# Altium PCB PCB1.PcbDoc
Units mil, origin at the board's own origin, x right, y up, seen from the top; angles counter-clockwise.
Board outline 6000 x 4000 mil, 2 copper layers (Top Layer, Bottom Layer); 21 components, 29 nets, 116 pads, 0 vias.
Unrouted connection lines stored in the file: 3.
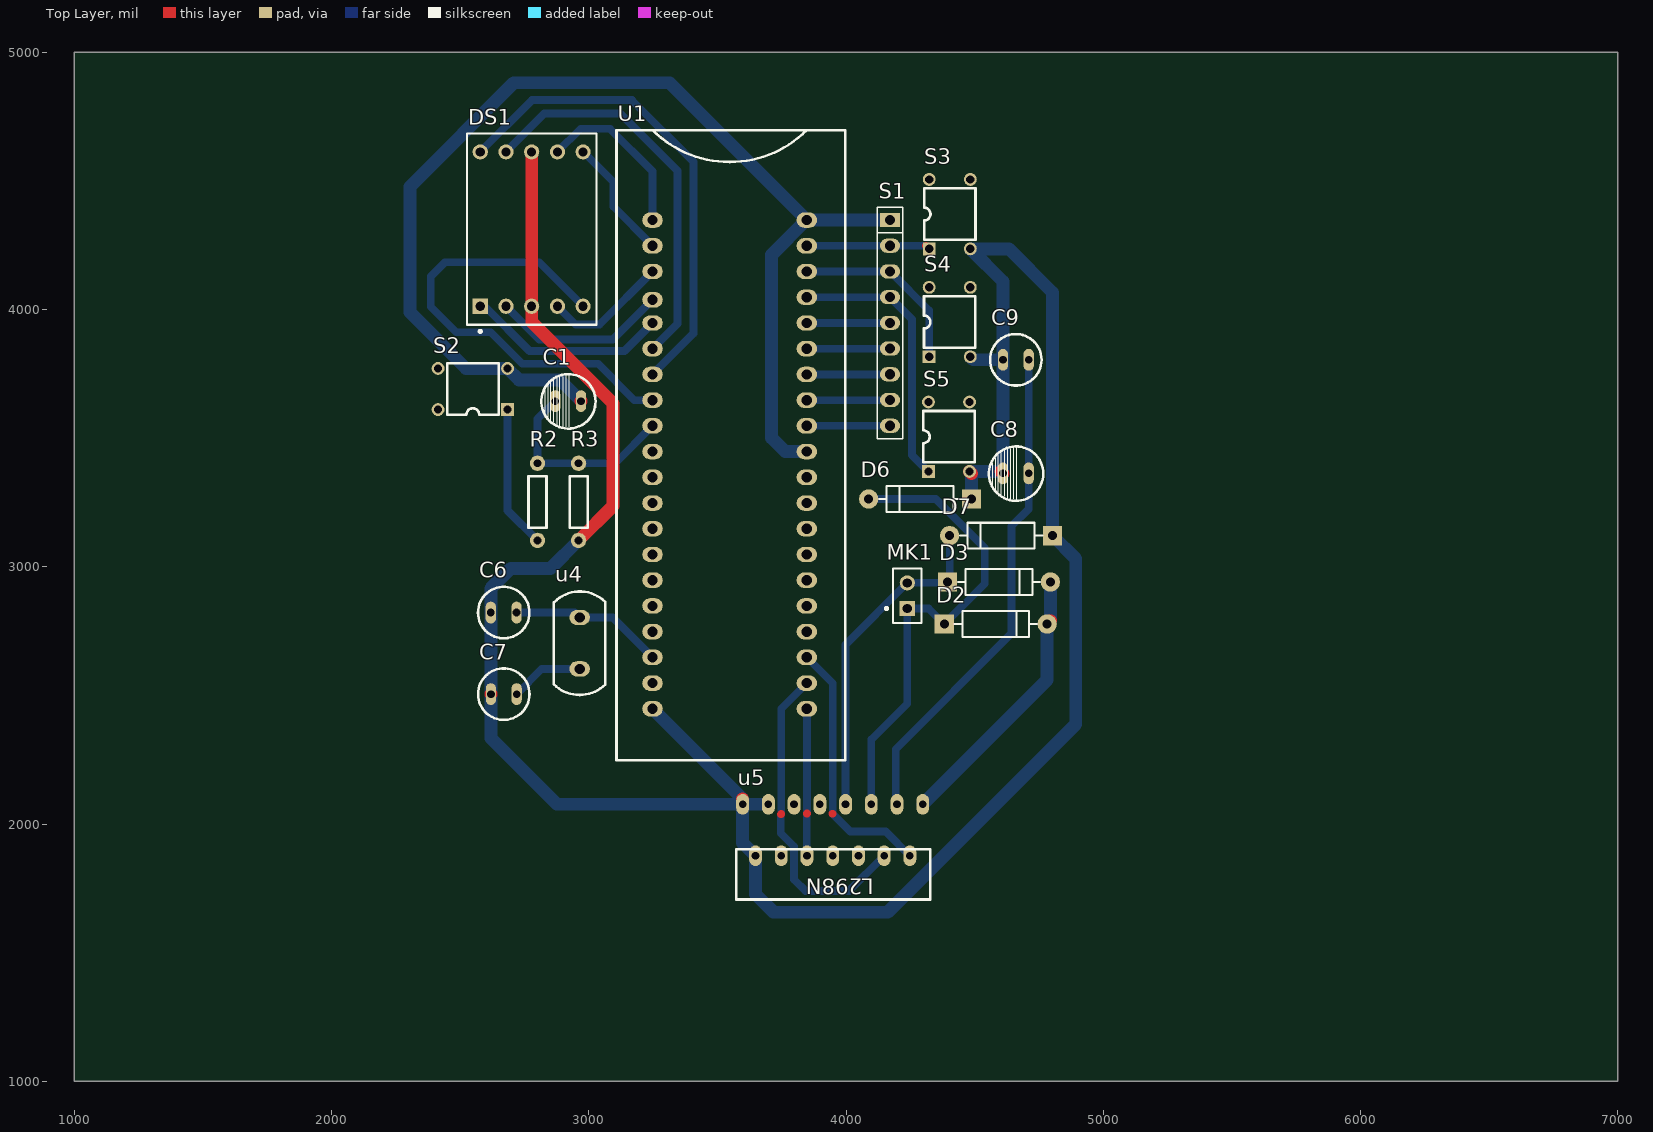
[diagram p0: Top Layer view]
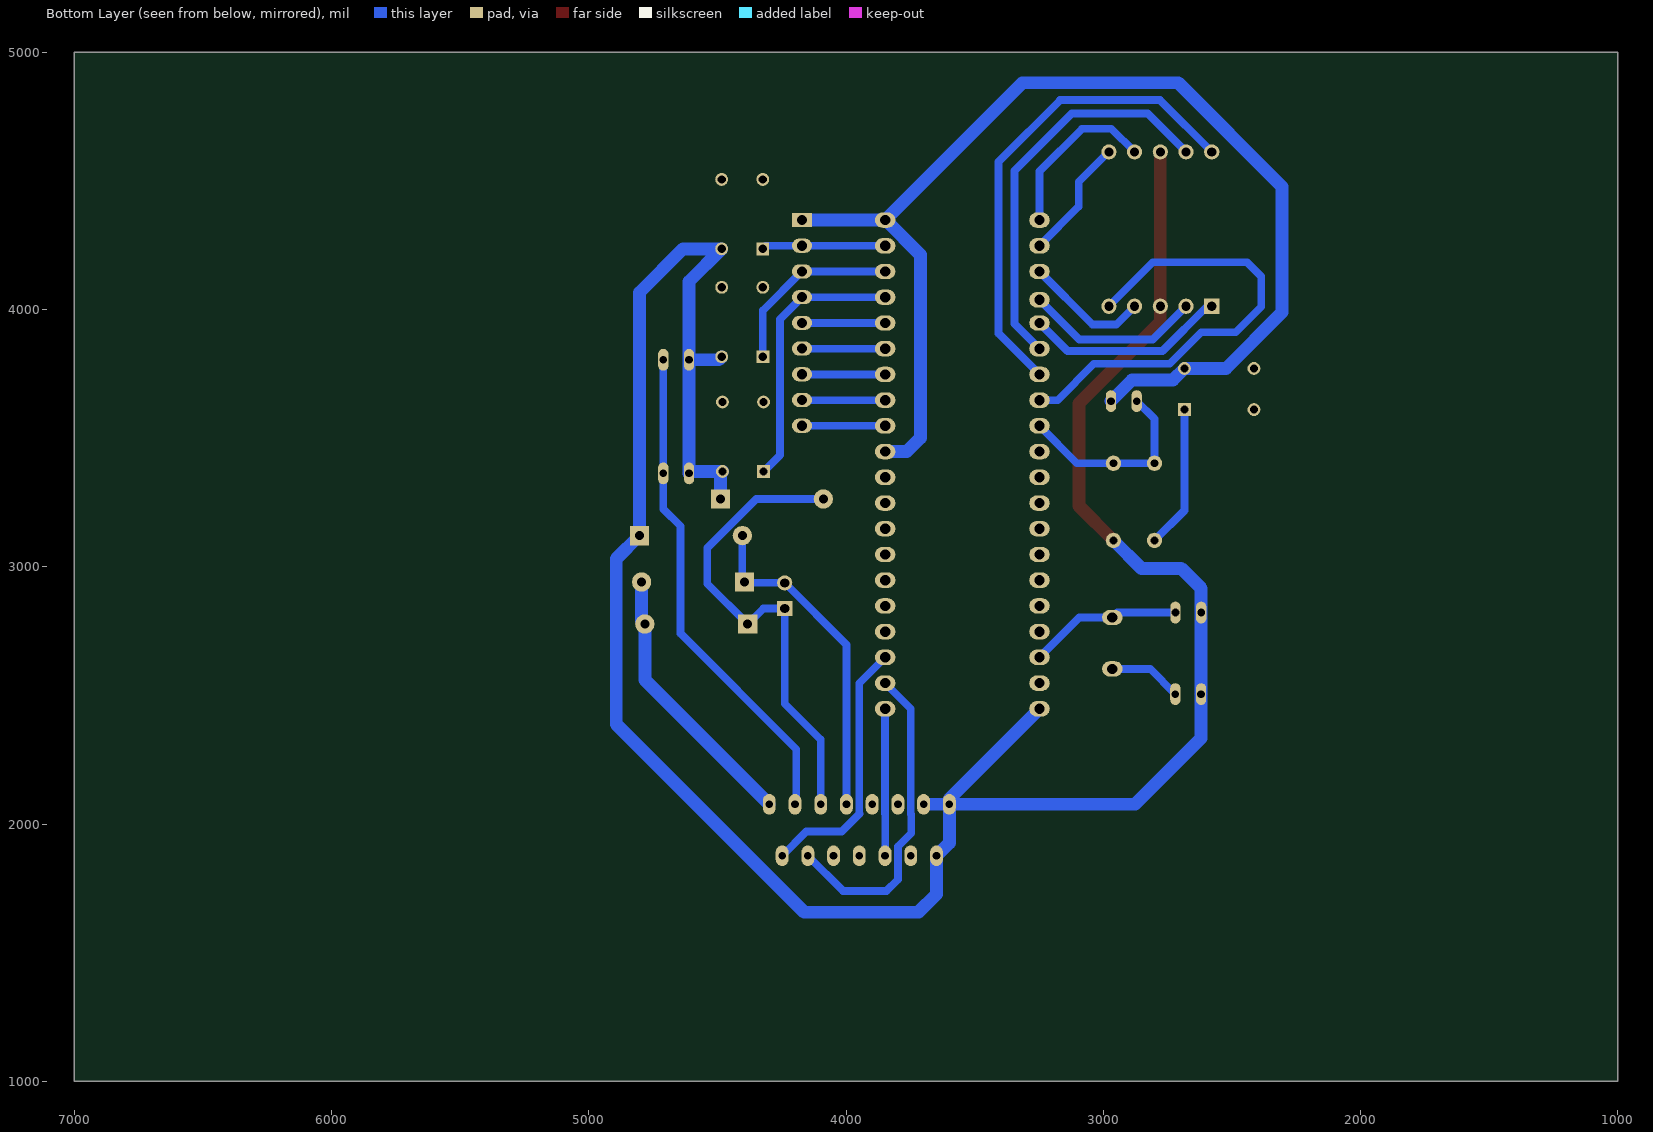
[diagram p1: Bottom Layer view, seen from below]

## Layer stack, top to bottom
Top Solder: solder mask 0.4, Solder Resist, Dk 3.5
Top Layer: signal copper 1.4
Dielectric 1: dielectric 12.6, FR-4, Dk 4.8
Bottom Layer: signal copper 1.4
Bottom Solder: solder mask 0.4, Solder Resist, Dk 3.5

## Board outline
1000,1000 7000,1000 7000,5000 1000,5000

## Design rules (kind name [scope] priority, off if disabled: settings)
Clearance [All] p1: gap=10 ignorepadtopadclearanceinfootprint=FALSE except(0: Arc-Hole Track-Hole SMDPad-Hole THPad-Hole Via-Hole Fill-Hole Poly-Hole Region-Hole Text-Hole)
PolygonConnect [All] p1: connectstyle=Relief reliefconductorwidth=10 reliefentries=4 polygonreliefangle="90 Angle" airgapwidth=10
RoutingVias [All] p1: holewidth=28 width=50 viastyle="Through Hole" minholewidth=28 minwidth=50 maxholewidth=28 maxwidth=50
SolderMaskExpansion [All] p1: expansion=4
Width PWR_5 [InNet('+5V')] p1: maxlimit=50 minlimit=50 preferedwidth=50 minimp=50.000000 maximp=50.000000 favimp=50.000000
Width VCC [InNet('VCC')] p2: maxlimit=50 minlimit=50 preferedwidth=50 minimp=50.000000 maximp=50.000000 favimp=50.000000
Width GND [InNet('GND')] p3: maxlimit=50 minlimit=50 preferedwidth=50 minimp=50.000000 maximp=50.000000 favimp=50.000000
Width SINGAL [All] p4: maxlimit=30 minlimit=30 preferedwidth=30 minimp=50.000000 maximp=50.000000 favimp=50.000000
Width [All] p5: maxlimit=30 minlimit=30 preferedwidth=30 minimp=50.000000 maximp=50.000000 favimp=50.000000
30 further rules are at their usual default settings.

## Components (designator, comment, footprint, x,y, rotation, side; value= is the part's Value field where it differs from the comment)
C1 "10μF" 电解电容 2969.85,3643.86 r180 top
C6 "22PF" 瓷片电容 2719.29,2821.85 r0 top
C7 "22PF" 瓷片电容 2719.61,2504.77 r0 top
C8 "100uf" 电解电容 4710.2,3363.16 r180 top
C9 "0.1uF" 瓷片电容 4610.2,3804.59 r180 top
D2 "1N4007" "二极管 直插" 4582.05,2777.32 r0 top
D3 "1N4007" "二极管 直插" 4594.63,2940.81 r0 top
D6 "1N4007" "二极管 直插" 4288.07,3263.34 r180 top
D7 "1N4007" "二极管 直插" 4603.01,3121.08 r180 top
DS1 "Dpy Blue-CC" LEDDIP-10/C15.24RHD 2778.11,4312.84 r0 top
MK1 "直流电机" PIN2 4238.29,2837.4 r90 top
R2 "1K" 电阻 2795.76,3247.4 r90 top
R3 "1K" 电阻 2955.27,3247.28 r90 top
S1 "10K" SIP9 4171,4348.18 r270 top
S2 "SW-PB" ANJIAN 2549.26,3590.96 r180 top
S3 "SW-PB" ANJIAN 4303.45,4370.98 r90 top
S4 "SW-PB" ANJIAN 4303.2,3951.43 r90 top
S5 "SW-PB" ANJIAN 4300.43,3505.47 r90 top
U1 "STC12" STC52 3247.83,4347.75 r0 top
u4 "XTAL" 晶振. 2964.41,2602.87 r180 top
u5 "L298N" L298N 3948.25,1876.58 r180 top

## Footprints (in the part's own frame and the unit in brackets; to place one, negate y for a bottom-side part, rotate by r counter-clockwise, add the part's x,y. Pads: shape width x height; smd on the part's side, far side on the other; paste and mask are expansions set on the pad)
ANJIAN [mil]
  rect 50x50 hole 32: 1(-135,-20)
  round 50 hole 32: 2(-135,-180) 3(135,-180) 4(135,-20)
  silkscreen extent -100,-200 100,0
L298N [mil]
  oval 50x80 hole 30: 1(350,-200) 2(-150,-200) 3(-50,-200) 4(-350,-200) 5(-300,0) 6(100,0) 7(-200,0) 8(300,0) 9(-250,-200) 10(-100,0) 11(200,0) 12(0,0) 13(50,-200) 14(150,-200) 15(250,-200)
  silkscreen extent -380,-25 375,170, body extent -384,-221 373,176, height 600
LEDDIP-10/C15.24RHD [mm]
  rect 1.5x1.5 hole 0.9: 1(-5.08,-7.62)
  round 1.5 hole 0.9: 2(-2.54,-7.62) 3(0,-7.62) 4(2.54,-7.62) 5(5.08,-7.62) 6(5.08,7.62) 7(2.54,7.62) 8(0,7.62) 9(-2.54,7.62) 10(-5.08,7.62)
  silkscreen extent -6.4,-10.22 6.4,9.45, body extent -6.4,-9.45 6.4,9.45, height 8.25
PIN2 [mm]
  rect 1.5x1.5 hole 0.9: 1(0,0)
  round 1.5 hole 0.9: 2(2.54,0)
  silkscreen extent -1.4,-1.4 3.94,2.17
SIP9 [mm]
  rect 1.4x2 hole 1: 1(0,0)
  oval 1.4x2 hole 1: 2(2.54,0) 3(5.08,0) 4(7.62,0) 5(10.16,0) 6(12.7,0) 7(15.24,0) 8(17.78,0) 9(20.32,0)
  silkscreen extent -1.27,-1.27 21.59,1.27, body extent -1.27,-1.27 21.59,1.27, height 8.89
STC52 [mil]
  oval 80x60 hole 40: 1(0,0) 2(0,-100) 3(0,-200) 4(0,-310) 5(0,-400) 6(0,-500) 7(0,-600) 8(0,-700) 9(0,-800) 10(0,-900) 11(0,-1000) 12(0,-1100) 13(0,-1200) 14(0,-1300) 15(0,-1400) 16(0,-1500) 17(0,-1600) 18(0,-1700) 19(0,-1800) 20(0,-1900) 21(600,-1900) 22(600,-1800) 23(600,-1700) 24(600,-1600) 25(600,-1500) 26(600,-1400) 27(600,-1300) 28(600,-1200) 29(600,-1100) 30(600,-1000) 31(600,-900) 32(600,-800) 33(600,-700) 34(600,-600) 35(600,-500) 36(600,-400) 37(600,-300) 38(600,-200) 39(600,-100) 40(600,0)
  silkscreen extent -140,-2100 750,350, body extent -18,-1935 623,36, height 370
"二极管 直插" [mil]
  rect 75x75 hole 35: 1(-200,0)
  round 75 hole 35: 2(200,0)
  silkscreen extent -160,-50 160,50, body extent -211,-52 211,54, height 103
晶振. [mil]
  oval 80x60 hole 40: 1(0,0) 2(0,-200)
  silkscreen extent -100,-301 100,101, body extent -104,-309 102,108, height 80
瓷片电容 [mil]
  oval 40x85 hole 30: 1(-100,0) 2(0,0)
  silkscreen extent -150,-100 50,100, body extent -150,-97 48,102, height 300
电解电容 [mil]
  oval 40x85 hole 30: 1(0,0) 2(100,0)
  silkscreen extent -57,-105 155,107, body extent -61,-111 158,109, height 261
电阻 [mil]
  round 60 hole 30: 1(-145,-5) 2(155,-5)
  silkscreen extent -95,-40 105,30

## Part data
C1: library part CAPACITOR, "Capacitor"
C6 C7: library part 瓷片电容
C8: library part 电解电容
C9: library part 瓷片电容_1
D2 D3 D6 D7: PackageDocument=Aug-1999, Code_JEDEC=DO-204-AL, ComponentLink1Description="Manufacturer Link", ComponentLink1URL=http://www.fairchildsemi.com/, ComponentLink2Description=Datasheet, ComponentLink2URL=http://www.fairchildsemi.com/ds/1N%2F1N4001.pdf, DatasheetDocument=1998, LatestRevisionDate=17-Jul-2002, LatestRevisionNote="Re-released for DXP Platform.", PackageReference=DO-41, Published=8-Jun-2000, Publisher="Altium Limited"
DS1: "14.2 mm General Purpose Blue 7-Segment Display: CC, RH DP, Gray Surface", Colour=Blue, ComponentLink1Description="Manufacturer Link", ComponentLink1URL=http://www.agilent.com/, DatasheetVersion=24-Sep-2002, LatestRevisionDate=17-Dec-2003, LatestRevisionNote="Schematic revised, PCB Footprint replaced.", MinimumIntensity="2020 ucd", Note="IF = 10 mA", PackageReference=H, PackageVersion=24-Sep-2002, Published=8-Jun-2000, Publisher="Altium Limited"
MK1: library part Mic2, "Microphone", LatestRevisionDate=17-Jul-2002, LatestRevisionNote="Re-released for DXP Platform.", PackageReference=PIN2, Published=24-Mar-1999, Publisher="Altium Limited"
R2 R3: library part R
S1: library part RES-9
U1: library part 12单片机

## Nets (pads, with @x,y where several pads share a name; then routed paths per layer and width w, separated by ;. In a path a pad name is that pad's centre, name@x,y a point inside that pad or via, vN(x,y) a via of type N, cw(c..) or ccw(c..) an arc to the next point about the centre after c; other vN are vias at no path point)
+5V: C1.1 S1.1 S2.2 U1.31 U1.40 | length 4615.3
  Top Layer w50: C1.1 C1.1@2969.85,3644.14 ; U1.40@3845.9,4347.75 U1.40 ; S1.1@4170.57,4347.75 S1.1
  Bottom Layer w50: C1.1@2969.85,3644.14 2888.13,3725.86 2729.35,3725.86 S2.2 2522.88,3770.96 2304.67,3989.16 2304.67,4477.31 2708.79,4881.42 3314.15,4881.42 U1.40 S1.1@4170.57,4347.75 ; U1.40@3845.9,4347.75 3711.03,4212.87 3711.03,3500.32 3763.6,3447.75 U1.31
+12V: C8.1 C9.1 u5.9 | length 1944
  Top Layer w30: u5.9@4193.49,2081.34 u5.9
  Bottom Layer w30: u5.9@4193.49,2081.34 4193.49,2290.95 4643.12,2740.58 4643.12,3157.62 4710.2,3224.7 C8.1 C9.1
ENA: U1.21 u5.6 | length 571.7
  Top Layer w30: u5.6@3847.83,1877.01 u5.6 ; 3847.83,2040.01 3848.25,2040.44 ; U1.21 U1.21@3848.25,2447.32
  Bottom Layer w30: u5.6@3847.83,1877.01 3847.83,2040.01 ; 3848.25,2040.44 U1.21@3848.25,2447.32
GND: C6.1 C7.1 C8.2 C9.2 D6.1 D7.1 DS1.3 DS1.8 R3.1 S3.2 S4.2 S5.2 U1.20 u5.1 u5.8 u5.15 | length 9753
  Top Layer w50: C7.1@2619.29,2505.09 C7.1 ; DS1.8 DS1.3 2778.11,3951.86 3094.9,3635.06 3094.9,3236.91 R3.1 ; u5.1 u5.1@3598.25,2097.32 ; S5.2 S5.2@4488.07,3362.84 ; C8.2@4602.89,3370.47 C8.2
  Bottom Layer w50: C7.1@2619.29,2505.09 C6.1 2619.29,2916.12 2697,2993.84 2851.83,2993.84 R3.1 ; C7.1 2619.61,2333.23 2876.26,2076.58 u5.1 ; U1.20 u5.1@3598.25,2097.32 ; u5.15 u5.1 ; S5.2 C8.2@4602.89,3370.47 ; S4.2 4495.03,3804.59 C9.2 ; D6.1 S5.2@4488.07,3362.84 ; C8.2 C9.2 ; u5.1 3598.25,1926.58 u5.8 3648.25,1727.16 3718.67,1656.75 4161.99,1656.75 4893.23,2387.98 4893.23,3030.86 D7.1 4803.01,4066.36 4633.39,4235.98 S3.2 4610.2,4109.23 C9.2
in1: U1.23 u5.5 | length 1018.1
  Top Layer w30: 3947.65,2039.66 3948.25,2040.26
  Bottom Layer w30: U1.23 3948.25,2547.32 3948.25,2040.26 ; 3947.65,2039.66 4016.62,1970.68 4154.15,1970.68 u5.5
in2: U1.22 u5.7 | length 1251.9
  Top Layer w30: 3746.66,2037.67 3748.25,2039.27
  Bottom Layer w30: 3746.66,2037.67 3746.66,1963.89 3798.25,1912.29 3798.25,1784.04 3842.43,1739.86 4011.54,1739.86 u5.7 ; 3748.25,2039.27 3748.25,2448.18 U1.22
NetC1_2: C1.2 R2.2 R3.2 U1.9 | length 777.4
  Top Layer w30: R3.2@2960.14,3402.4 R3.2
  Bottom Layer w30: C1.2 2800.76,3574.77 R2.2 R3.2@2960.14,3402.4 ; R3.2 3102.35,3402.28 U1.9
NetC6_2: C6.2 U1.18 u4.2 | length 600.7
  Bottom Layer w30: C6.2 2945.43,2821.85 u4.2 3092.7,2802.87 U1.18
NetC7_2: C7.2 u4.1 | length 285.4
  Bottom Layer w30: C7.2 2817.71,2602.87 u4.1
NetR2_1: R2.1 S2.1 | length 556.8
  Bottom Layer w30: S2.1 2684.26,3218.91 R2.1
NetS1_5: S1.5 U1.36 | length 323.4
  Top Layer w30: S1.5@4170.57,3947.75 S1.5
  Bottom Layer w30: U1.36 S1.5@4170.57,3947.75
NetS1_6: S1.6 U1.35 | length 323.4
  Top Layer w30: S1.6@4170.57,3847.75 S1.6
  Bottom Layer w30: U1.35 S1.6@4170.57,3847.75
NetS1_7: S1.7 U1.34 | length 323.4
  Top Layer w30: S1.7@4170.57,3747.75 S1.7
  Bottom Layer w30: U1.34 S1.7@4170.57,3747.75
NetS1_8: S1.8 U1.33 | length 323.4
  Top Layer w30: S1.8@4170.57,3647.75 S1.8
  Bottom Layer w30: U1.33 S1.8@4170.57,3647.75
NetS1_9: S1.9 U1.32 | length 323.4
  Top Layer w30: S1.9@4170.57,3547.75 S1.9
  Bottom Layer w30: U1.32 S1.9@4170.57,3547.75
OUT1: D2.1 D6.2 MK1.1 u5.2 | length 1878.5
  Bottom Layer w30: D6.2 4349.13,3263.34 4539.36,3073.11 4539.36,2934.63 D2.1 4321.97,2837.4 MK1.1 4238.29,2468.15 4098.25,2328.11 u5.2
OUT2: D3.1 D7.2 MK1.2 u5.3 | length 1301.7
  Top Layer w30: D3.1@4391.22,2937.4 D3.1 D3.1@4403.01,2949.2
  Bottom Layer w30: u5.3 3998.25,2697.37 MK1.2 D3.1@4391.22,2937.4 ; D3.1@4403.01,2949.2 D7.2
P0.1: S1.2 S3.1 U1.39 | length 480.9
  Top Layer w30: S1.2@4170.57,4247.75 S1.2 ; S3.1@4311.25,4248.18 S3.1
  Bottom Layer w30: U1.39 S1.2@4170.57,4247.75 ; S1.2 S3.1@4311.25,4248.18
P0.2: S1.3 S4.1 U1.38 | length 718.2
  Top Layer w30: U1.38 U1.38@3848.26,4148.18
  Bottom Layer w30: U1.38@3848.26,4148.18 S1.3 4323.2,3995.99 S4.1
P0.3: S1.4 S5.1 U1.37 | length 1063
  Top Layer w30: S1.4@4170.57,4047.75 S1.4
  Bottom Layer w30: U1.37 S1.4@4170.57,4047.75 ; S1.4 4256.66,3962.53 4256.66,3434.24 S5.1
P1.0: DS1.7 U1.1 | length 665.6
  Bottom Layer w30: DS1.7 2968.49,4703.22 3082.28,4703.22 3247.83,4537.67 U1.1
P1.1: DS1.6 U1.2 | length 476.8
  Bottom Layer w30: DS1.6 3094.65,4496.3 3094.65,4400.93 U1.2
P1.2: DS1.4 U1.3 | length 484.7
  Bottom Layer w30: DS1.4 2949.5,3941.45 3041.52,3941.45 U1.3
P1.3: DS1.2 U1.4 | length 700.3
  Top Layer w30: U1.4@3234.76,4037.75 U1.4
  Bottom Layer w30: DS1.2 2807.46,3883.48 3093.56,3883.48 U1.4
P1.4: DS1.1 U1.5 | length 787
  Bottom Layer w30: DS1.1 2595.61,4012.84 2769.71,3838.74 3138.82,3838.74 U1.5
P1.5: DS1.9 U1.6 | length 1552.8
  Bottom Layer w30: DS1.9 2827.22,4761.95 3122.84,4761.95 3344.83,4539.97 3344.83,3944.75 U1.6
P1.6: DS1.10 U1.7 | length 1904.7
  Bottom Layer w30: DS1.10 2779.42,4814.15 3167.82,4814.15 3407.22,4574.75 3407.22,3907.15 U1.7
P1.7: DS1.5 U1.8 | length 1815.4
  Bottom Layer w30: DS1.5 2807.48,4183.47 2441.16,4183.47 2386.17,4128.47 2386.17,4010.38 2484.85,3911.69 2619.12,3911.69 2742.07,3788.75 3036.5,3788.75 3177.49,3647.75 U1.8
VCC: D2.2 D3.2 u5.4 | length 1069.8
  Top Layer w50: D2.2 D2.2@4794.63,2789.89
  Bottom Layer w50: u5.4 4782.05,2560.38 D2.2 ; D2.2@4794.63,2789.89 D3.2
pads on no net: S2.3 S2.4 S3.3 S3.4 S4.3 S4.4 S5.3 S5.4 U1.10 U1.11 U1.12 U1.13 U1.14 U1.15 U1.16 U1.17 U1.19 U1.24 U1.25 U1.26 U1.27 U1.28 U1.29 U1.30 u5.10 u5.11 u5.12 u5.13 u5.14